# Altium PCB STM32F302VC_EVM.PcbDoc (part 12 of 19)
Units mil, origin at the board's own origin, x right, y up, seen from the top; angles counter-clockwise.
Board outline 3937.01 x 3937.01 mil, 2 copper layers (Top Layer, Bottom Layer); 117 components, 166 nets, 602 pads, 373 vias.
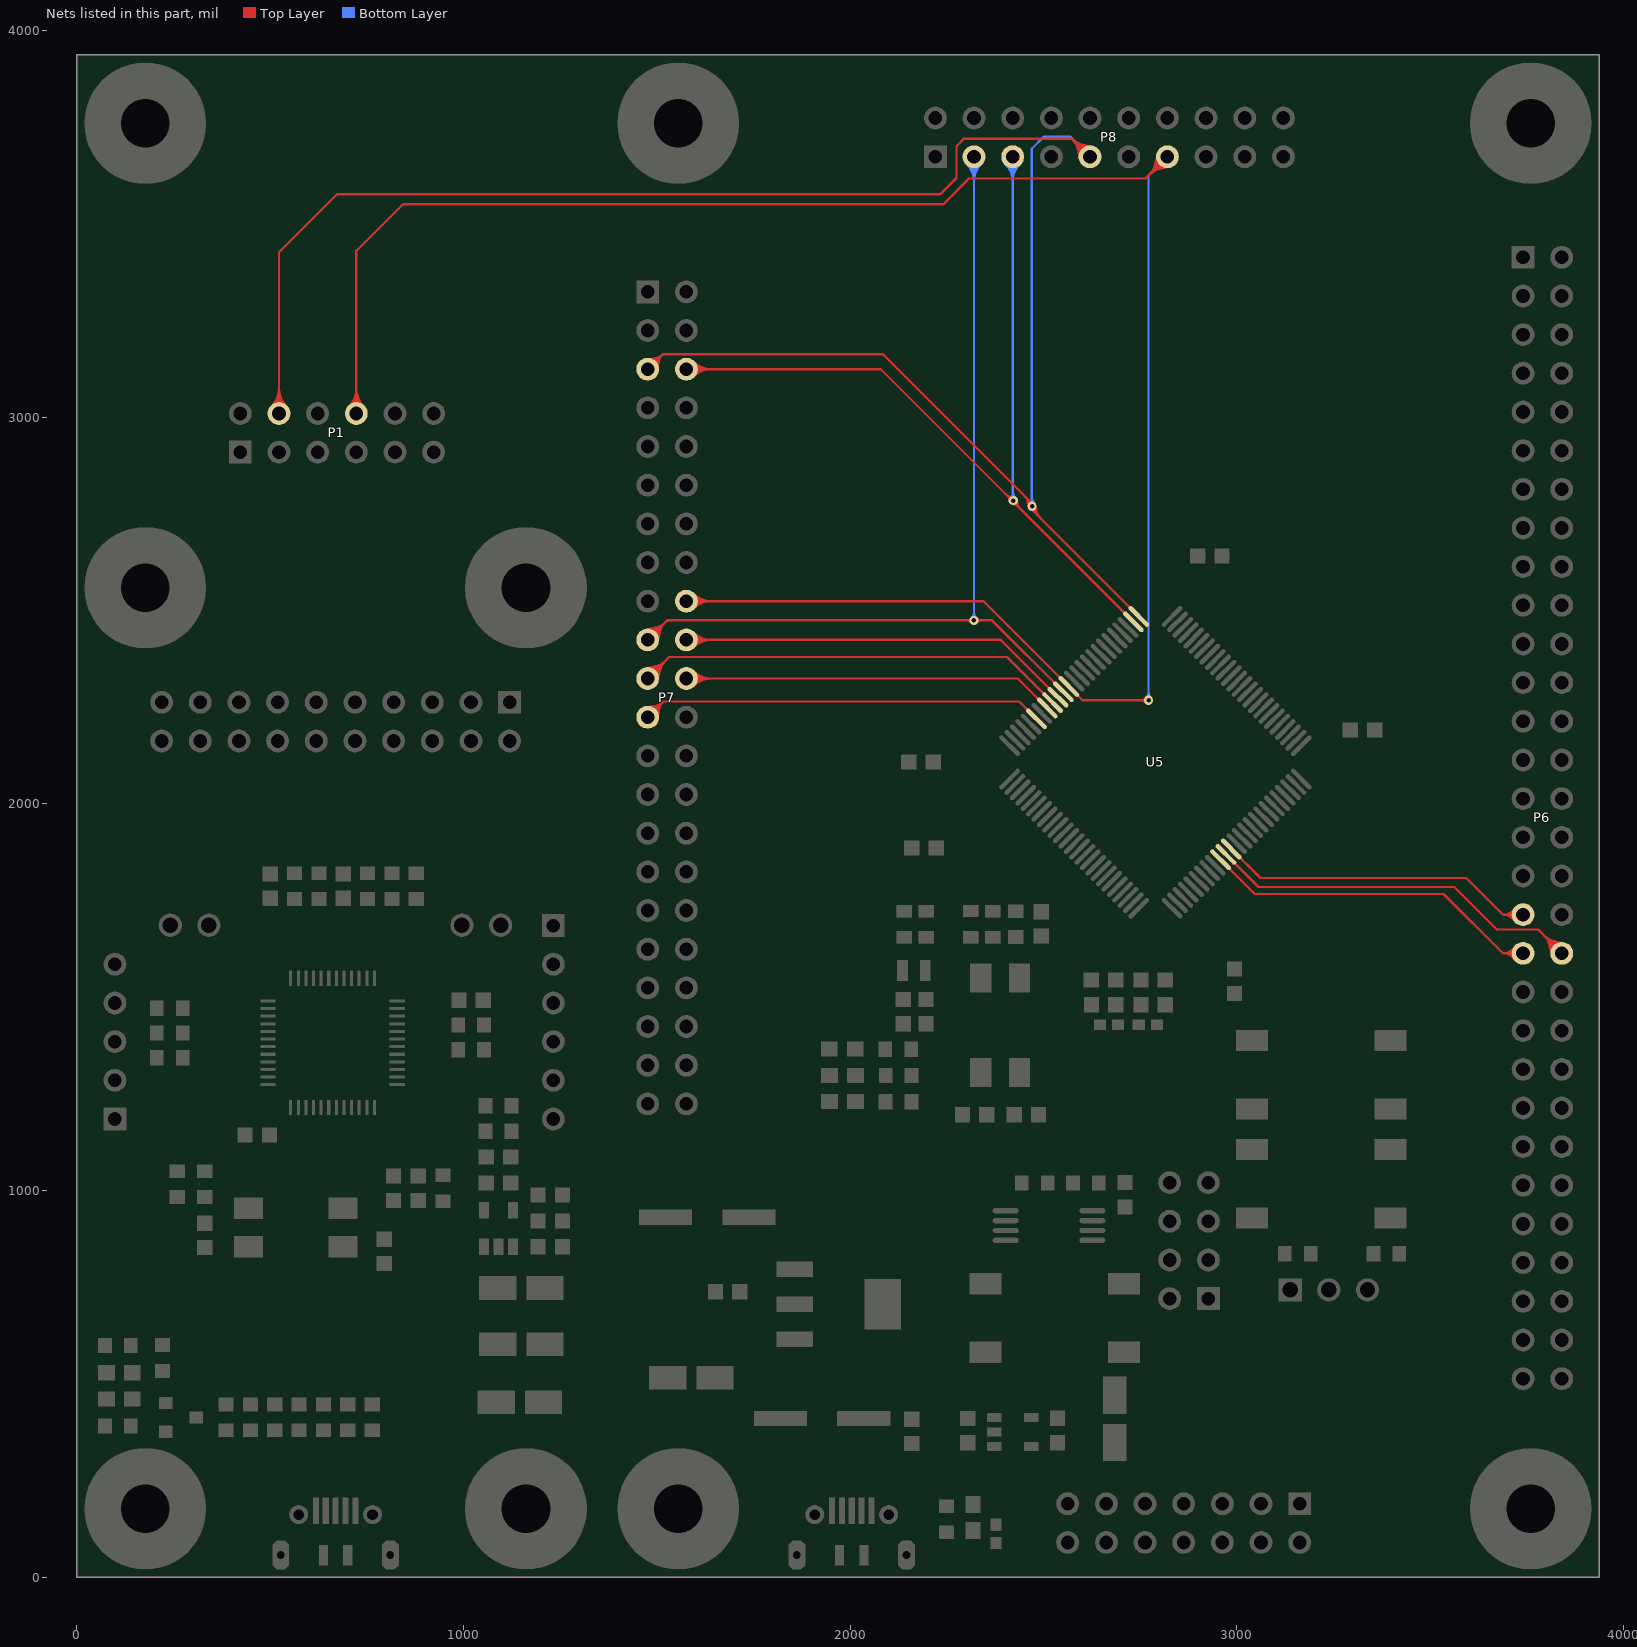
[diagram p12: the nets of this part, all layers, seen from the top]

## Via types
v1: diameter 23.62, hole 11.81, Top Layer to Bottom Layer, tented both sides, 372 vias
v2: diameter 50, hole 28, Top Layer to Bottom Layer, tented both sides, 1 vias

## Nets (pads, with @x,y where several pads share a name; then routed paths per layer and width w, separated by ;. In a path a pad name is that pad's centre, name@x,y a point inside that pad or via, vN(x,y) a via of type N, cw(c..) or ccw(c..) an arc to the next point about the centre after c; other vN are vias at no path point) (continued)
PA14: P1.4 P7.5 P8.9 U5.76 | length 12288.5
  Top Layer w6: P1.4@522.83,3009.45 522.83,3426.19 673.42,3576.77 2233.51,3576.77 2274.8,3618.06 2274.8,3700.74 2294.34,3720.28 2573.42,3720.28 P8.9@2620.28,3673.43 ; P7.5@1472.91,3124.14 cw(c1500.19,3123.15) 1492.04,3149.21 ; P7.5@1476.07,3132.54 ccw(c1474.86,3165.82) 1506.64,3155.87 ; P7.5@1476.12,3132.54 ccw(c1475.11,3165.49) 1506.55,3155.57 ; P7.5@1476.38,3124.02 1514.91,3162.54 ; P7.5@1476.5,3120.55 ccw(c1475.51,3147.83) 1501.57,3139.67 ; P7.5@1478.9,3123.92 cw(c1509.18,3122.82) 1500.13,3151.74 ; P7.5@1478.9,3123.94 cw(c1508.9,3123.02) 1499.87,3151.64 ; P7.5@1480.86,3144.05 ccw(c1485.29,3163.81) 1496.92,3147.24 ; P7.5@1482.08,3143.74 ccw(c1487.83,3163.62) 1505.96,3153.64 ; P7.5@1482.17,3149.9 ccw(c1489.3,3181.73) 1508.03,3155.04 ccw(c1518.77,3139.74) P7.5@1501.25,3133.24 ; P7.5@1482.18,3143.71 ccw(c1487.96,3163.3) 1505.86,3153.45 ; P7.5@1483.52,3143.26 ccw(c1489.31,3158.87) 1502.93,3149.3 ; P7.5@1484.9,3123.71 cw(c1518.18,3122.5) 1508.23,3154.28 ; P7.5@1484.9,3123.76 cw(c1517.85,3122.75) 1507.93,3154.18 ; P7.5@1484.99,3149.11 ccw(c1491.73,3168.78) 1506.21,3153.84 ; P7.5@1485.13,3149.06 ccw(c1491.85,3168.28) 1506.19,3153.83 ; P7.5@1485.55,3148.91 ccw(c1492.17,3166.87) 1505.92,3153.55 ; P7.5@1485.6,3148.89 ccw(c1492.1,3166.41) 1507.4,3155.67 ccw(c1534.09,3136.93) P7.5@1502.27,3129.81 ; P7.5@1495.62,3131.15 cw(c1511.23,3136.94) 1501.67,3150.57 ; P7.5@1496.07,3129.83 cw(c1515.65,3135.6) 1505.79,3153.48 ; P7.5@1496.41,3128.5 cw(c1516.17,3132.92) 1499.6,3144.56 ; P7.5@1501.27,3133.19 cw(c1519.24,3139.81) 1505.91,3153.56 ; P7.5@1501.31,3133.07 cw(c1519.63,3139.71) 1505.9,3153.54 ; P7.5@1501.34,3132.98 cw(c1519.91,3139.65) 1505.91,3153.54 ; P7.5@1501.42,3132.77 cw(c1520.65,3139.48) 1506.19,3153.83 ; P7.5@1501.47,3132.62 cw(c1521.15,3139.37) 1506.21,3153.84 ; 1504,3147.51 cw(c1475.38,3156.54) 1476.3,3126.54 ccw(c1475.19,3156.82) 1504.1,3147.77 ; 1505.98,3153.59 ccw(c1515.96,3135.47) P7.5@1496.1,3129.72 ; 2460.1,2781.75 cw(c2455.21,2775.76) v1@2462.4,2772.92 ; 2460.91,2781.09 ccw(c2468.49,2790.39) v1@2469.7,2778.45 ; v1@2470.88,2760.88 cw(c2471.27,2748.88) 2479.47,2757.64 ; v1@2478.95,2766.9 ccw(c2489.37,2763.42) 2481.86,2755.41 ; U5.76@2746.22,2484.5 2470.59,2760.13 2470.59,2776.45 2084.5,3162.54 1514.91,3162.54 ; P1.4@504.08,3028.21 ccw(c458.79,3073.49) 522.83,3073.49 ; P1.4@504.08,3028.21 ccw(c458.79,3073.49) 522.83,3073.49 ; P1.4@504.08,3028.21 ccw(c458.79,3073.49) 522.83,3073.49 ; P1.4@508.32,3023.96 ccw(c473.28,3059.01) 522.83,3059.01 ; P1.4@508.32,3023.96 ccw(c473.28,3059.01) 522.83,3059.01 ; P1.4@508.32,3023.96 ccw(c473.28,3059.01) 522.83,3059.01 ; P1.4@512.56,3019.72 ccw(c487.76,3044.52) 522.83,3044.52 ; P1.4@512.56,3019.72 ccw(c487.76,3044.52) 522.83,3044.52 ; P1.4@512.56,3019.72 ccw(c487.76,3044.52) 522.83,3044.52 ; 522.83,3044.52 ccw(c557.91,3044.52) P1.4@533.11,3019.72 ; 522.83,3044.52 ccw(c557.91,3044.52) P1.4@533.11,3019.72 ; 522.83,3044.52 ccw(c557.91,3044.52) P1.4@533.11,3019.72 ; 522.83,3059.01 ccw(c572.39,3059.01) P1.4@537.35,3023.96 ; 522.83,3059.01 ccw(c572.39,3059.01) P1.4@537.35,3023.96 ; 522.83,3059.01 ccw(c572.39,3059.01) P1.4@537.35,3023.96 ; 522.83,3073.49 ccw(c586.88,3073.49) P1.4@541.59,3028.21 ; 522.83,3073.49 ccw(c586.88,3073.49) P1.4@541.59,3028.21 ; 522.83,3073.49 ccw(c586.88,3073.49) P1.4@541.59,3028.21 ; P7.5@1463.55,3132.67 cw(c1501.91,3106.78) 1495.4,3152.6 ; P7.5@1463.55,3132.67 cw(c1501.91,3106.78) 1495.4,3152.6 ; P7.5@1463.55,3132.67 cw(c1501.91,3106.78) 1495.4,3152.6 ; P7.5@1478.13,3138.44 ccw(c1480.95,3161.64) 1497.48,3145.11 ; P7.5@1478.13,3138.44 ccw(c1480.95,3161.64) 1497.48,3145.11 ; P7.5@1478.13,3138.44 ccw(c1480.95,3161.64) 1497.48,3145.11 ; P7.5@1478.85,3144.39 ccw(c1482.83,3177.19) 1506.19,3153.83 ; P7.5@1478.85,3144.39 ccw(c1482.83,3177.19) 1506.19,3153.83 ; P7.5@1478.85,3144.39 ccw(c1482.83,3177.19) 1506.19,3153.83 ; P7.5@1479.58,3150.35 ccw(c1484.72,3192.73) 1514.9,3162.54 ; P7.5@1479.58,3150.35 ccw(c1484.72,3192.73) 1514.9,3162.54 ; P7.5@1479.58,3150.35 ccw(c1484.72,3192.73) 1514.9,3162.54 ; P7.5@1480.41,3137.97 ccw(c1485.7,3156.31) 1502.47,3147.21 ; P7.5@1480.41,3137.97 ccw(c1485.7,3156.31) 1502.47,3147.21 ; P7.5@1480.41,3137.97 ccw(c1485.7,3156.31) 1502.47,3147.21 ; P7.5@1482.07,3143.74 ccw(c1487.82,3163.65) 1506.03,3153.76 ; P7.5@1482.07,3143.74 ccw(c1487.82,3163.65) 1506.03,3153.76 ; P7.5@1482.07,3143.74 ccw(c1487.82,3163.65) 1506.03,3153.76 ; P7.5@1483.92,3149.45 ccw(c1490.6,3172) 1501.82,3151.33 ; P7.5@1483.92,3149.45 ccw(c1490.6,3172) 1501.82,3151.33 ; P7.5@1483.92,3149.45 ccw(c1490.6,3172) 1501.82,3151.33 ; P7.5@1485.04,3111.19 ccw(c1459.14,3149.54) 1504.96,3143.04 ; P7.5@1485.04,3111.19 ccw(c1459.14,3149.54) 1504.96,3143.04 ; P7.5@1485.04,3111.19 ccw(c1459.14,3149.54) 1504.96,3143.04 ; P7.5@1485.1,3149.07 ccw(c1491.83,3168.37) 1506.19,3153.83 ; P7.5@1485.1,3149.07 ccw(c1491.83,3168.37) 1506.19,3153.83 ; P7.5@1485.1,3149.07 ccw(c1491.83,3168.37) 1506.19,3153.83 ; P7.5@1485.24,3149.02 ccw(c1491.93,3167.91) 1506.19,3153.83 ; P7.5@1485.24,3149.02 ccw(c1491.93,3167.91) 1506.19,3153.83 ; P7.5@1485.24,3149.02 ccw(c1491.93,3167.91) 1506.19,3153.83 ; P7.5@1485.32,3148.99 ccw(c1491.99,3167.63) 1505.9,3153.55 ; P7.5@1485.32,3148.99 ccw(c1491.99,3167.63) 1505.9,3153.55 ; P7.5@1485.32,3148.99 ccw(c1491.99,3167.63) 1505.9,3153.55 ; P7.5@1485.45,3148.94 ccw(c1492.1,3167.19) 1505.91,3153.54 ; P7.5@1485.45,3148.94 ccw(c1492.1,3167.19) 1505.91,3153.54 ; P7.5@1485.43,3148.95 ccw(c1492.08,3167.27) 1505.91,3153.54 ; P7.5@1485.45,3148.94 ccw(c1492.1,3167.19) 1505.91,3153.54 ; P7.5@1490.34,3128.04 cw(c1508.67,3133.34) 1499.57,3150.11 ; P7.5@1490.34,3128.04 cw(c1508.67,3133.34) 1499.57,3150.11 ; P7.5@1490.34,3128.04 cw(c1508.67,3133.34) 1499.57,3150.11 ; P7.5@1490.8,3125.77 cw(c1514.01,3128.58) 1497.48,3145.11 ; P7.5@1490.8,3125.77 cw(c1514.01,3128.58) 1497.48,3145.11 ; P7.5@1490.8,3125.77 cw(c1514.01,3128.58) 1497.48,3145.11 ; P7.5@1496.1,3129.71 cw(c1516.01,3135.45) 1506.13,3153.67 ; P7.5@1496.1,3129.71 cw(c1516.01,3135.45) 1506.13,3153.67 ; P7.5@1496.1,3129.71 cw(c1516.01,3135.45) 1506.13,3153.67 ; P7.5@1496.76,3126.49 cw(c1529.55,3130.47) 1506.19,3153.83 ; P7.5@1496.76,3126.49 cw(c1529.55,3130.47) 1506.19,3153.83 ; P7.5@1496.76,3126.49 cw(c1529.55,3130.47) 1506.19,3153.83 ; P7.5@1501.3,3133.09 cw(c1519.55,3139.73) 1505.9,3153.55 ; P7.5@1501.3,3133.09 cw(c1519.55,3139.73) 1505.9,3153.55 ; P7.5@1501.3,3133.09 cw(c1519.55,3139.73) 1505.9,3153.55 ; P7.5@1501.35,3132.97 cw(c1519.96,3139.64) 1506.21,3153.84 ; P7.5@1501.35,3132.96 cw(c1520,3139.63) 1505.91,3153.54 ; P7.5@1501.35,3132.96 cw(c1520,3139.63) 1505.91,3153.54 ; P7.5@1501.35,3132.96 cw(c1520,3139.63) 1505.91,3153.54 ; P7.5@1501.38,3132.87 cw(c1520.28,3139.57) 1506.19,3153.83 ; P7.5@1501.39,3132.85 cw(c1520.36,3139.55) 1506.19,3153.83 ; P7.5@1501.38,3132.87 cw(c1520.28,3139.57) 1506.19,3153.83 ; P7.5@1501.4,3132.84 cw(c1520.4,3139.54) 1505.92,3153.55 ; P7.5@1501.38,3132.87 cw(c1520.28,3139.57) 1506.19,3153.83 ; P7.5@1501.43,3132.74 cw(c1520.73,3139.46) 1506.19,3153.83 ; P7.5@1501.43,3132.74 cw(c1520.73,3139.46) 1506.19,3153.83 ; P7.5@1501.43,3132.74 cw(c1520.73,3139.46) 1506.19,3153.83 ; P7.5@1501.81,3131.55 cw(c1524.36,3138.24) 1503.69,3149.46 ; P7.5@1501.81,3131.55 cw(c1524.36,3138.24) 1503.69,3149.46 ; P7.5@1501.81,3131.55 cw(c1524.36,3138.24) 1503.69,3149.46 ; P7.5@1502.71,3127.21 cw(c1545.09,3132.36) 1514.9,3162.54 ; P7.5@1502.71,3127.21 cw(c1545.09,3132.36) 1514.9,3162.54 ; P7.5@1502.71,3127.21 cw(c1545.09,3132.36) 1514.9,3162.54 ; 1505.9,3153.54 cw(c1492.01,3167.54) 1485.34,3148.98 ccw(c1492,3167.59) 1506.21,3153.84 ; 1505.92,3153.56 cw(c1491.9,3168.03) 1485.2,3149.03 ccw(c1491.91,3168) 1506.19,3153.83 ; 2450.77,2796.28 cw(c2424.17,2769.68) v1@2461.78,2769.68 ; 2450.77,2796.28 cw(c2424.17,2769.68) v1@2461.78,2769.68 ; 2450.77,2796.28 cw(c2424.17,2769.68) v1@2461.78,2769.68 ; 2456.2,2790.52 ccw(c2483.22,2797.76) v1@2471.75,2772.25 ; 2456.2,2790.52 ccw(c2483.22,2797.76) v1@2471.75,2772.25 ; 2456.2,2790.52 ccw(c2483.22,2797.76) v1@2471.75,2772.25 ; 2459.47,2778.31 ccw(c2476.53,2782.88) v1@2469.29,2766.78 ; 2459.47,2778.31 ccw(c2476.53,2782.88) v1@2469.29,2766.78 ; 2459.47,2778.31 ccw(c2476.53,2782.88) v1@2469.29,2766.78 ; 2461.01,2786.04 cw(c2444.65,2769.68) v1@2467.78,2769.68 ; 2461.01,2786.04 cw(c2444.65,2769.68) v1@2467.78,2769.68 ; 2461.01,2786.04 cw(c2444.65,2769.68) v1@2467.78,2769.68 ; v1@2462.96,2774.09 ccw(c2452.57,2780.09) 2464.16,2783.2 ; v1@2462.96,2774.09 ccw(c2452.57,2780.09) 2464.16,2783.2 ; v1@2462.96,2774.09 ccw(c2452.57,2780.09) 2464.16,2783.2 ; v1@2469.27,2767.21 cw(c2453.7,2738.11) 2485.58,2746.65 ; v1@2469.27,2767.21 cw(c2453.7,2738.11) 2485.58,2746.65 ; v1@2469.27,2767.21 cw(c2453.7,2738.11) 2485.58,2746.65 ; v1@2472.1,2772.5 cw(c2462.65,2754.84) 2481.99,2760.02 ; v1@2472.1,2772.5 cw(c2462.65,2754.84) 2481.99,2760.02 ; v1@2472.1,2772.5 cw(c2462.65,2754.84) 2481.99,2760.02 ; v1@2473.4,2769.68 ccw(c2503.27,2769.68) 2482.15,2748.57 ; v1@2473.4,2769.68 ccw(c2503.27,2769.68) 2482.15,2748.57 ; v1@2473.4,2769.68 ccw(c2503.27,2769.68) 2482.15,2748.57 ; 2477.02,2756.17 cw(c2488.62,2759.28) v1@2478.22,2765.28 ; 2477.02,2756.17 cw(c2488.62,2759.28) v1@2478.22,2765.28 ; 2477.02,2756.17 cw(c2488.62,2759.28) v1@2478.22,2765.28 ; v1@2479.4,2769.68 ccw(c2523.75,2769.68) 2492.39,2738.33 ; v1@2479.4,2769.68 ccw(c2523.75,2769.68) 2492.39,2738.33 ; v1@2479.4,2769.68 ccw(c2523.75,2769.68) 2492.39,2738.33 ; 2574.99,3718.71 cw(c2529.7,3673.43) P8.9@2593.75,3673.43 ; 2574.99,3718.71 ccw(c2620.28,3764) P8.9@2620.28,3699.95 ; 2574.99,3718.71 ccw(c2620.28,3764) P8.9@2620.28,3699.95 ; 2574.99,3718.71 cw(c2529.7,3673.43) P8.9@2593.75,3673.43 ; 2574.99,3718.71 ccw(c2620.28,3764) P8.9@2620.28,3699.95 ; 2574.99,3718.71 cw(c2529.7,3673.43) P8.9@2593.75,3673.43 ; 2585.23,3708.47 cw(c2550.19,3673.43) P8.9@2599.75,3673.43 ; 2585.23,3708.47 ccw(c2620.28,3743.51) P8.9@2620.28,3693.95 ; 2585.23,3708.47 ccw(c2620.28,3743.51) P8.9@2620.28,3693.95 ; 2585.23,3708.47 cw(c2550.19,3673.43) P8.9@2599.75,3673.43 ; 2585.23,3708.47 ccw(c2620.28,3743.51) P8.9@2620.28,3693.95 ; 2585.23,3708.47 cw(c2550.19,3673.43) P8.9@2599.75,3673.43 ; 2586.25,3701.42 ccw(c2628.32,3712.69) P8.9@2619.58,3670.02 ; 2586.25,3701.42 ccw(c2628.32,3712.69) P8.9@2619.58,3670.02 ; 2586.25,3701.42 ccw(c2628.32,3712.69) P8.9@2619.58,3670.02 ; 2588.76,3692.04 ccw(c2626.14,3702.06) P8.9@2618.38,3664.15 ; 2588.76,3692.04 ccw(c2626.14,3702.06) P8.9@2618.38,3664.15 ; 2588.76,3692.04 ccw(c2626.14,3702.06) P8.9@2618.38,3664.15 ; 2591.27,3682.66 ccw(c2623.96,3691.42) P8.9@2617.17,3658.27 ; 2591.27,3682.66 ccw(c2623.96,3691.42) P8.9@2617.17,3658.27 ; 2591.27,3682.66 ccw(c2623.96,3691.42) P8.9@2617.17,3658.27 ; 2592.28,3707.45 cw(c2581.01,3665.38) P8.9@2623.68,3674.12 ; 2592.28,3707.45 cw(c2581.01,3665.38) P8.9@2623.68,3674.12 ; 2592.28,3707.45 cw(c2581.01,3665.38) P8.9@2623.68,3674.12 ; 2592.97,3698.72 ccw(c2622.76,3706.7) P8.9@2620.46,3675.95 ; 2592.97,3698.72 ccw(c2622.76,3706.7) P8.9@2620.46,3675.95 ; 2592.97,3698.72 ccw(c2622.76,3706.7) P8.9@2620.46,3675.95 ; 2594.99,3700.73 cw(c2587,3670.94) P8.9@2617.76,3673.24 ; 2594.99,3700.73 cw(c2587,3670.94) P8.9@2617.76,3673.24 ; 2594.99,3700.73 cw(c2587,3670.94) P8.9@2617.76,3673.24 ; 2595.16,3690.55 ccw(c2622.09,3697.77) P8.9@2620.02,3669.96 ; 2595.16,3690.55 ccw(c2622.09,3697.77) P8.9@2620.02,3669.96 ; 2595.16,3690.55 ccw(c2622.09,3697.77) P8.9@2620.02,3669.96 ; 2595.48,3698.23 cw(c2570.68,3673.43) P8.9@2605.75,3673.43 ; 2595.48,3698.23 ccw(c2620.28,3723.03) P8.9@2620.28,3687.95 ; 2595.48,3698.23 ccw(c2620.28,3723.03) P8.9@2620.28,3687.95 ; 2595.48,3698.23 cw(c2570.68,3673.43) P8.9@2605.75,3673.43 ; 2595.48,3698.23 ccw(c2620.28,3723.03) P8.9@2620.28,3687.95 ; 2595.48,3698.23 cw(c2570.68,3673.43) P8.9@2605.75,3673.43 ; 2601.66,3704.94 cw(c2591.65,3667.56) P8.9@2629.56,3675.33 ; 2601.66,3704.94 cw(c2591.65,3667.56) P8.9@2629.56,3675.33 ; 2601.66,3704.94 cw(c2591.65,3667.56) P8.9@2629.56,3675.33 ; 2603.15,3698.54 cw(c2595.93,3671.61) P8.9@2623.74,3673.68 ; 2603.15,3698.54 cw(c2595.93,3671.61) P8.9@2623.74,3673.68 ; 2603.15,3698.54 cw(c2595.93,3671.61) P8.9@2623.74,3673.68 ; 2611.04,3702.43 cw(c2602.28,3669.74) P8.9@2635.43,3676.53 ; 2611.04,3702.43 cw(c2602.28,3669.74) P8.9@2635.43,3676.53 ; 2611.04,3702.43 cw(c2602.28,3669.74) P8.9@2635.43,3676.53 ; 2720.38,2510.34 cw(c2715.42,2505.38) U5.76@2722.44,2505.38 ; 2720.38,2510.34 ccw(c2725.34,2515.3) U5.76@2725.34,2508.28 ; 2720.38,2510.34 ccw(c2725.34,2515.3) U5.76@2725.34,2508.28 ; 2720.38,2510.34 cw(c2715.42,2505.38) U5.76@2722.44,2505.38 ; 2720.38,2510.34 ccw(c2725.34,2515.3) U5.76@2725.34,2508.28 ; 2720.38,2510.34 cw(c2715.42,2505.38) U5.76@2722.44,2505.38
  Bottom Layer w6: v1(2470.59,2769.68) 2470.59,2762.93 2470.05,2762.39 2469.49,2762.39 2469.49,3693.9 2500.98,3725.39 2568.31,3725.39 P8.9@2620.28,3673.43 ; v1@2464.36,2775.92 ccw(c2451.99,2788.29) 2469.49,2788.29 ; v1@2464.36,2775.92 ccw(c2451.99,2788.29) 2469.49,2788.29 ; v1@2464.36,2775.92 ccw(c2451.99,2788.29) 2469.49,2788.29 ; 2469.49,2793.62 ccw(c2494.53,2793.62) v1@2476.82,2775.92 ; 2469.49,2793.62 ccw(c2494.53,2793.62) v1@2476.82,2775.92 ; 2469.49,2793.62 ccw(c2494.53,2793.62) v1@2476.82,2775.92 ; 2574.99,3718.71 cw(c2529.7,3673.43) P8.9@2593.75,3673.43 ; 2574.99,3718.71 ccw(c2620.28,3764) P8.9@2620.28,3699.95 ; 2574.99,3718.71 ccw(c2620.28,3764) P8.9@2620.28,3699.95 ; 2574.99,3718.71 cw(c2529.7,3673.43) P8.9@2593.75,3673.43 ; 2574.99,3718.71 ccw(c2620.28,3764) P8.9@2620.28,3699.95 ; 2574.99,3718.71 cw(c2529.7,3673.43) P8.9@2593.75,3673.43 ; 2585.23,3708.47 cw(c2550.19,3673.43) P8.9@2599.75,3673.43 ; 2585.23,3708.47 ccw(c2620.28,3743.51) P8.9@2620.28,3693.95 ; 2585.23,3708.47 ccw(c2620.28,3743.51) P8.9@2620.28,3693.95 ; 2585.23,3708.47 cw(c2550.19,3673.43) P8.9@2599.75,3673.43 ; 2585.23,3708.47 ccw(c2620.28,3743.51) P8.9@2620.28,3693.95 ; 2585.23,3708.47 cw(c2550.19,3673.43) P8.9@2599.75,3673.43 ; 2595.48,3698.23 cw(c2570.68,3673.43) P8.9@2605.75,3673.43 ; 2595.48,3698.23 ccw(c2620.28,3723.03) P8.9@2620.28,3687.95 ; 2595.48,3698.23 ccw(c2620.28,3723.03) P8.9@2620.28,3687.95 ; 2595.48,3698.23 cw(c2570.68,3673.43) P8.9@2605.75,3673.43 ; 2595.48,3698.23 ccw(c2620.28,3723.03) P8.9@2620.28,3687.95 ; 2595.48,3698.23 cw(c2570.68,3673.43) P8.9@2605.75,3673.43
PA15: P7.6 P8.5 U5.77 | length 4207.9
  Top Layer w6: P7.6@1576.38,3124.02 2078.86,3124.02 U5.77@2732.3,2470.58 ; P7.6@1586.65,3113.74 cw(c1611.45,3088.94) 1611.45,3124.02 ; P7.6@1586.65,3113.74 cw(c1611.45,3088.94) 1611.45,3124.02 ; P7.6@1586.65,3113.74 cw(c1611.45,3088.94) 1611.45,3124.02 ; P7.6@1586.65,3134.29 ccw(c1611.45,3159.09) 1611.45,3124.02 ; P7.6@1586.65,3134.29 ccw(c1611.45,3159.09) 1611.45,3124.02 ; P7.6@1586.65,3134.29 ccw(c1611.45,3159.09) 1611.45,3124.02 ; P7.6@1590.89,3109.5 cw(c1625.93,3074.46) 1625.93,3124.02 ; P7.6@1590.89,3109.5 cw(c1625.93,3074.46) 1625.93,3124.02 ; P7.6@1590.89,3109.5 cw(c1625.93,3074.46) 1625.93,3124.02 ; P7.6@1590.89,3138.53 ccw(c1625.94,3173.57) 1625.94,3124.02 ; P7.6@1590.89,3138.53 ccw(c1625.94,3173.57) 1625.94,3124.02 ; P7.6@1590.89,3138.53 ccw(c1625.94,3173.57) 1625.94,3124.02 ; P7.6@1595.14,3105.26 cw(c1640.42,3059.97) 1640.42,3124.02 ; P7.6@1595.14,3105.26 cw(c1640.42,3059.97) 1640.42,3124.02 ; P7.6@1595.14,3105.26 cw(c1640.42,3059.97) 1640.42,3124.02 ; P7.6@1595.14,3142.77 ccw(c1640.42,3188.06) 1640.42,3124.02 ; P7.6@1595.14,3142.77 ccw(c1640.42,3188.06) 1640.42,3124.02 ; P7.6@1595.14,3142.77 ccw(c1640.42,3188.06) 1640.42,3124.02 ; 2401.74,2801.15 ccw(c2421.72,2821.14) v1@2421.72,2792.87 ; 2401.74,2801.15 ccw(c2421.72,2821.14) v1@2421.72,2792.87 ; 2401.74,2801.15 ccw(c2421.72,2821.14) v1@2421.72,2792.87 ; 2408.73,2794.15 cw(c2398.64,2784.05) v1@2412.91,2784.05 ; 2408.73,2794.15 cw(c2398.64,2784.05) v1@2412.91,2784.05 ; 2408.73,2794.15 cw(c2398.64,2784.05) v1@2412.91,2784.05 ; 2411.98,2790.9 ccw(c2421.72,2800.65) v1@2421.72,2786.87 ; 2411.98,2790.9 ccw(c2421.72,2800.65) v1@2421.72,2786.87 ; 2411.98,2790.9 ccw(c2421.72,2800.65) v1@2421.72,2786.87 ; 2414.53,2794.79 cw(c2410.72,2780.56) v1@2424.76,2785.02 ; 2414.53,2794.79 cw(c2410.72,2780.56) v1@2424.76,2785.02 ; 2414.53,2794.79 cw(c2410.72,2780.56) v1@2424.76,2785.02 ; v1@2421.72,2775.24 cw(c2421.72,2760.97) 2431.82,2771.06 ; v1@2421.72,2775.24 cw(c2421.72,2760.97) 2431.82,2771.06 ; v1@2421.72,2775.24 cw(c2421.72,2760.97) 2431.82,2771.06 ; v1@2422.69,2787.09 cw(c2418.23,2773.05) 2432.46,2776.86 ; v1@2422.69,2787.09 cw(c2418.23,2773.05) 2432.46,2776.86 ; v1@2422.69,2787.09 cw(c2418.23,2773.05) 2432.46,2776.86 ; v1@2424.54,2784.05 ccw(c2438.32,2784.05) 2428.57,2774.31 ; v1@2424.54,2784.05 ccw(c2438.32,2784.05) 2428.57,2774.31 ; v1@2424.54,2784.05 ccw(c2438.32,2784.05) 2428.57,2774.31 ; v1@2430.54,2784.05 ccw(c2458.81,2784.05) 2438.82,2764.06 ; v1@2430.54,2784.05 ccw(c2458.81,2784.05) 2438.82,2764.06 ; v1@2430.54,2784.05 ccw(c2458.81,2784.05) 2438.82,2764.06 ; 2706.46,2496.42 cw(c2701.5,2491.46) U5.77@2708.52,2491.46 ; 2706.46,2496.42 ccw(c2711.42,2501.38) U5.77@2711.42,2494.36 ; 2706.46,2496.42 ccw(c2711.42,2501.38) U5.77@2711.42,2494.36 ; 2706.46,2496.42 cw(c2701.5,2491.46) U5.77@2708.52,2491.46 ; 2706.46,2496.42 ccw(c2711.42,2501.38) U5.77@2711.42,2494.36 ; 2706.46,2496.42 cw(c2701.5,2491.46) U5.77@2708.52,2491.46
  Bottom Layer w6: P8.5@2420.28,3673.43 2420.28,2782.61 v1(2421.72,2784.05) ; P8.5@2401.52,3654.67 cw(c2356.23,3609.38) 2420.28,3609.38 ; P8.5@2401.52,3654.67 cw(c2356.23,3609.38) 2420.28,3609.38 ; P8.5@2401.52,3654.67 cw(c2356.23,3609.38) 2420.28,3609.38 ; P8.5@2405.76,3658.91 cw(c2370.72,3623.87) 2420.28,3623.87 ; P8.5@2405.76,3658.91 cw(c2370.72,3623.87) 2420.28,3623.87 ; P8.5@2405.76,3658.91 cw(c2370.72,3623.87) 2420.28,3623.87 ; P8.5@2410,3663.15 cw(c2385.2,3638.35) 2420.28,3638.35 ; P8.5@2410,3663.15 cw(c2385.2,3638.35) 2420.28,3638.35 ; P8.5@2410,3663.15 cw(c2385.2,3638.35) 2420.28,3638.35 ; v1@2415.49,2790.28 ccw(c2403.95,2801.83) 2420.28,2801.83 ; v1@2415.49,2790.28 ccw(c2403.95,2801.83) 2420.28,2801.83 ; v1@2415.49,2790.28 ccw(c2403.95,2801.83) 2420.28,2801.83 ; 2420.28,2808.83 ccw(c2446.5,2808.83) v1@2427.96,2790.28 ; 2420.28,2808.83 ccw(c2446.5,2808.83) v1@2427.96,2790.28 ; 2420.28,2808.83 ccw(c2446.5,2808.83) v1@2427.96,2790.28 ; 2420.28,3609.38 cw(c2484.32,3609.38) P8.5@2439.03,3654.67 ; 2420.28,3609.38 cw(c2484.32,3609.38) P8.5@2439.03,3654.67 ; 2420.28,3609.38 cw(c2484.32,3609.38) P8.5@2439.03,3654.67 ; 2420.28,3623.87 cw(c2469.83,3623.87) P8.5@2434.79,3658.91 ; 2420.28,3623.87 cw(c2469.83,3623.87) P8.5@2434.79,3658.91 ; 2420.28,3623.87 cw(c2469.83,3623.87) P8.5@2434.79,3658.91 ; 2420.28,3638.35 cw(c2455.35,3638.35) P8.5@2430.55,3663.15 ; 2420.28,3638.35 cw(c2455.35,3638.35) P8.5@2430.55,3663.15 ; 2420.28,3638.35 cw(c2455.35,3638.35) P8.5@2430.55,3663.15
PB0: P6.37 U5.35 | length 1296.4
  Top Layer w6: U5.35@2957.8,1855.34 3046.4,1766.73 3534.65,1766.73 3687.99,1613.39 ; P6.37@3740.16,1613.39 3687.99,1613.39 ; U5.35@2978.67,1831.56 cw(c2978.67,1824.54) 2983.63,1829.5 ; U5.35@2978.67,1831.56 cw(c2978.67,1824.54) 2983.63,1829.5 ; U5.35@2978.67,1831.56 cw(c2978.67,1824.54) 2983.63,1829.5 ; U5.35@2981.58,1834.46 ccw(c2988.59,1834.46) 2983.63,1829.5 ; U5.35@2981.58,1834.46 ccw(c2988.59,1834.46) 2983.63,1829.5 ; U5.35@2981.58,1834.46 ccw(c2988.59,1834.46) 2983.63,1829.5 ; 3687.99,1613.39 cw(c3687.99,1575.36) P6.37@3718.72,1597.76 ; 3687.99,1613.39 ccw(c3687.99,1651.41) P6.37@3718.72,1629.01 ; 3687.99,1613.39 ccw(c3687.99,1651.41) P6.37@3718.72,1629.01 ; 3687.99,1613.39 cw(c3687.99,1575.36) P6.37@3718.72,1597.76 ; 3687.99,1613.39 ccw(c3687.99,1651.41) P6.37@3718.72,1629.01 ; 3687.99,1613.39 cw(c3687.99,1575.36) P6.37@3718.72,1597.76 ; 3699.79,1613.39 cw(c3699.79,1583.96) P6.37@3723.57,1601.29 ; 3699.79,1613.39 ccw(c3699.79,1642.81) P6.37@3723.57,1625.48 ; 3699.79,1613.39 ccw(c3699.79,1642.81) P6.37@3723.57,1625.48 ; 3699.79,1613.39 cw(c3699.79,1583.96) P6.37@3723.57,1601.29 ; 3699.79,1613.39 ccw(c3699.79,1642.81) P6.37@3723.57,1625.48 ; 3699.79,1613.39 cw(c3699.79,1583.96) P6.37@3723.57,1601.29
PB1: P6.38 U5.36 | length 2914.3
  Top Layer w6: U5.36@2971.71,1869.26 3056.1,1784.87 3562.02,1784.87 3672.03,1674.86 3779.26,1674.86 P6.38@3840.44,1613.67 ; U5.36@2992.59,1845.48 cw(c2992.59,1838.46) 2997.55,1843.42 ; U5.36@2992.59,1845.48 cw(c2992.59,1838.46) 2997.55,1843.42 ; U5.36@2992.59,1845.48 cw(c2992.59,1838.46) 2997.55,1843.42 ; U5.36@2995.5,1848.38 ccw(c3002.51,1848.38) 2997.55,1843.42 ; U5.36@2995.5,1848.38 ccw(c3002.51,1848.38) 2997.55,1843.42 ; U5.36@2995.5,1848.38 ccw(c3002.51,1848.38) 2997.55,1843.42 ; 3794.47,1659.65 cw(c3748.2,1613.39) P6.38@3813.63,1613.39 ; 3794.47,1659.65 cw(c3748.2,1613.39) P6.38@3813.63,1613.39 ; 3794.47,1659.65 cw(c3748.2,1613.39) P6.38@3813.63,1613.39 ; 3795.85,1658.26 ccw(c3840.16,1702.57) P6.38@3840.16,1639.91 ; 3795.85,1658.26 ccw(c3840.16,1702.57) P6.38@3840.16,1639.91 ; 3795.85,1658.26 ccw(c3840.16,1702.57) P6.38@3840.16,1639.91 ; 3804.71,1649.41 cw(c3768.68,1613.39) P6.38@3819.63,1613.39 ; 3804.71,1649.41 cw(c3768.68,1613.39) P6.38@3819.63,1613.39 ; 3804.71,1649.41 cw(c3768.68,1613.39) P6.38@3819.63,1613.39 ; 3806.05,1641.67 ccw(c3848.6,1653.07) P6.38@3839.44,1609.99 ; 3806.05,1641.67 ccw(c3848.6,1653.07) P6.38@3839.44,1609.99 ; 3806.05,1641.67 ccw(c3848.6,1653.07) P6.38@3839.44,1609.99 ; 3806.1,1648.02 ccw(c3840.16,1682.08) P6.38@3840.16,1633.91 ; 3806.1,1648.02 ccw(c3840.16,1682.08) P6.38@3840.16,1633.91 ; 3806.1,1648.02 ccw(c3840.16,1682.08) P6.38@3840.16,1633.91 ; 3808.58,1632.22 ccw(c3846.31,1642.32) P6.38@3838.19,1604.12 ; 3808.58,1632.22 ccw(c3846.31,1642.32) P6.38@3838.19,1604.12 ; 3808.58,1632.22 ccw(c3846.31,1642.32) P6.38@3838.19,1604.12 ; 3811.12,1622.76 ccw(c3844.03,1631.57) P6.38@3836.94,1598.25 ; 3811.12,1622.76 ccw(c3844.03,1631.57) P6.38@3836.94,1598.25 ; 3811.12,1622.76 ccw(c3844.03,1631.57) P6.38@3836.94,1598.25 ; 3812.46,1647.34 cw(c3801.31,1605.74) P6.38@3843.56,1614.06 ; 3812.46,1647.34 cw(c3801.31,1605.74) P6.38@3843.56,1614.06 ; 3812.46,1647.34 cw(c3801.31,1605.74) P6.38@3843.56,1614.06 ; 3812.76,1639.01 ccw(c3843.02,1647.12) P6.38@3840.37,1615.9 ; 3812.76,1639.01 ccw(c3843.02,1647.12) P6.38@3840.37,1615.9 ; 3812.76,1639.01 ccw(c3843.02,1647.12) P6.38@3840.37,1615.9 ; 3814.95,1639.17 cw(c3789.17,1613.39) P6.38@3825.63,1613.39 ; 3814.95,1639.17 cw(c3789.17,1613.39) P6.38@3825.63,1613.39 ; 3814.95,1639.17 cw(c3789.17,1613.39) P6.38@3825.63,1613.39 ; 3814.98,1630.76 ccw(c3842.25,1638.06) P6.38@3839.86,1609.93 ; 3814.98,1630.76 ccw(c3842.25,1638.06) P6.38@3839.86,1609.93 ; 3814.98,1630.76 ccw(c3842.25,1638.06) P6.38@3839.86,1609.93 ; 3815.2,1640.6 cw(c3807.35,1611.28) P6.38@3837.64,1613.22 ; 3815.2,1640.6 cw(c3807.35,1611.28) P6.38@3837.64,1613.22 ; 3815.2,1640.6 cw(c3807.35,1611.28) P6.38@3837.64,1613.22 ; 3816.34,1637.78 ccw(c3840.16,1661.6) P6.38@3840.16,1627.91 ; 3816.34,1637.78 ccw(c3840.16,1661.6) P6.38@3840.16,1627.91 ; 3816.34,1637.78 ccw(c3840.16,1661.6) P6.38@3840.16,1627.91 ; 3821.76,1644.84 cw(c3811.84,1607.81) P6.38@3849.45,1615.22 ; 3821.76,1644.84 cw(c3811.84,1607.81) P6.38@3849.45,1615.22 ; 3821.76,1644.84 cw(c3811.84,1607.81) P6.38@3849.45,1615.22 ; 3823.28,1638.44 cw(c3816.15,1611.85) P6.38@3843.62,1613.61 ; 3823.28,1638.44 cw(c3816.15,1611.85) P6.38@3843.62,1613.61 ; 3823.28,1638.44 cw(c3816.15,1611.85) P6.38@3843.62,1613.61 ; 3831.06,1642.35 cw(c3822.36,1609.88) P6.38@3855.34,1616.37 ; 3831.06,1642.35 cw(c3822.36,1609.88) P6.38@3855.34,1616.37 ; 3831.06,1642.35 cw(c3822.36,1609.88) P6.38@3855.34,1616.37
PB2: P6.35 U5.37 | length 1238.7
  Top Layer w6: U5.37@2985.63,1883.18 3060.74,1808.07 3593.31,1808.07 3687.99,1713.39 ; P6.35@3740.16,1713.39 3687.99,1713.39 ; U5.37@3006.51,1859.4 cw(c3006.51,1852.38) 3011.47,1857.34 ; U5.37@3006.51,1859.4 cw(c3006.51,1852.38) 3011.47,1857.34 ; U5.37@3006.51,1859.4 cw(c3006.51,1852.38) 3011.47,1857.34 ; U5.37@3009.42,1862.3 ccw(c3016.43,1862.3) 3011.47,1857.34 ; U5.37@3009.42,1862.3 ccw(c3016.43,1862.3) 3011.47,1857.34 ; U5.37@3009.42,1862.3 ccw(c3016.43,1862.3) 3011.47,1857.34 ; 3687.99,1713.39 cw(c3687.99,1675.36) P6.35@3718.72,1697.76 ; 3687.99,1713.39 ccw(c3687.99,1751.41) P6.35@3718.72,1729.01 ; 3687.99,1713.39 ccw(c3687.99,1751.41) P6.35@3718.72,1729.01 ; 3687.99,1713.39 cw(c3687.99,1675.36) P6.35@3718.72,1697.76 ; 3687.99,1713.39 ccw(c3687.99,1751.41) P6.35@3718.72,1729.01 ; 3687.99,1713.39 cw(c3687.99,1675.36) P6.35@3718.72,1697.76 ; 3699.79,1713.39 cw(c3699.79,1683.96) P6.35@3723.57,1701.29 ; 3699.79,1713.39 ccw(c3699.79,1742.81) P6.35@3723.57,1725.48 ; 3699.79,1713.39 ccw(c3699.79,1742.81) P6.35@3723.57,1725.48 ; 3699.79,1713.39 cw(c3699.79,1683.96) P6.35@3723.57,1701.29 ; 3699.79,1713.39 ccw(c3699.79,1742.81) P6.35@3723.57,1725.48 ; 3699.79,1713.39 cw(c3699.79,1683.96) P6.35@3723.57,1701.29
PB3: P1.8 P7.18 P8.13 U5.89 | length 9621.1
  Top Layer w6: P1.8@722.83,3009.45 722.83,3429.94 843.46,3550.57 2241.25,3550.57 2307.61,3616.94 2763.79,3616.94 P8.13@2820.28,3673.43 ; P7.18@1576.38,2524.02 2344.8,2524.02 U5.89@2565.27,2303.55 2601.1,2267.72 v1(2771.65,2267.72) ; P1.8@704.08,3028.21 ccw(c658.79,3073.49) 722.83,3073.49 ; P1.8@704.08,3028.21 ccw(c658.79,3073.49) 722.83,3073.49 ; P1.8@704.08,3028.21 ccw(c658.79,3073.49) 722.83,3073.49 ; P1.8@708.32,3023.96 ccw(c673.28,3059.01) 722.83,3059.01 ; P1.8@708.32,3023.96 ccw(c673.28,3059.01) 722.83,3059.01 ; P1.8@708.32,3023.96 ccw(c673.28,3059.01) 722.83,3059.01 ; P1.8@712.56,3019.72 ccw(c687.76,3044.52) 722.83,3044.52 ; P1.8@712.56,3019.72 ccw(c687.76,3044.52) 722.83,3044.52 ; P1.8@712.56,3019.72 ccw(c687.76,3044.52) 722.83,3044.52 ; 722.83,3044.52 ccw(c757.91,3044.52) P1.8@733.11,3019.72 ; 722.83,3044.52 ccw(c757.91,3044.52) P1.8@733.11,3019.72 ; 722.83,3044.52 ccw(c757.91,3044.52) P1.8@733.11,3019.72 ; 722.83,3059.01 ccw(c772.39,3059.01) P1.8@737.35,3023.96 ; 722.83,3059.01 ccw(c772.39,3059.01) P1.8@737.35,3023.96 ; 722.83,3059.01 ccw(c772.39,3059.01) P1.8@737.35,3023.96 ; 722.83,3073.49 ccw(c786.88,3073.49) P1.8@741.59,3028.21 ; 722.83,3073.49 ccw(c786.88,3073.49) P1.8@741.59,3028.21 ; 722.83,3073.49 ccw(c786.88,3073.49) P1.8@741.59,3028.21 ; P7.18@1586.65,2513.74 cw(c1611.45,2488.94) 1611.45,2524.02 ; P7.18@1586.65,2513.74 cw(c1611.45,2488.94) 1611.45,2524.02 ; P7.18@1586.65,2513.74 cw(c1611.45,2488.94) 1611.45,2524.02 ; P7.18@1586.65,2534.29 ccw(c1611.45,2559.09) 1611.45,2524.02 ; P7.18@1586.65,2534.29 ccw(c1611.45,2559.09) 1611.45,2524.02 ; P7.18@1586.65,2534.29 ccw(c1611.45,2559.09) 1611.45,2524.02 ; P7.18@1590.89,2509.5 cw(c1625.93,2474.46) 1625.93,2524.02 ; P7.18@1590.89,2509.5 cw(c1625.93,2474.46) 1625.93,2524.02 ; P7.18@1590.89,2509.5 cw(c1625.93,2474.46) 1625.93,2524.02 ; P7.18@1590.89,2538.53 ccw(c1625.94,2573.57) 1625.94,2524.02 ; P7.18@1590.89,2538.53 ccw(c1625.94,2573.57) 1625.94,2524.02 ; P7.18@1590.89,2538.53 ccw(c1625.94,2573.57) 1625.94,2524.02 ; P7.18@1595.14,2505.26 cw(c1640.42,2459.97) 1640.42,2524.02 ; P7.18@1595.14,2505.26 cw(c1640.42,2459.97) 1640.42,2524.02 ; P7.18@1595.14,2505.26 cw(c1640.42,2459.97) 1640.42,2524.02 ; P7.18@1595.14,2542.77 ccw(c1640.42,2588.06) 1640.42,2524.02 ; P7.18@1595.14,2542.77 ccw(c1640.42,2588.06) 1640.42,2524.02 ; P7.18@1595.14,2542.77 ccw(c1640.42,2588.06) 1640.42,2524.02 ; 2539.43,2329.39 cw(c2534.47,2324.43) U5.89@2541.48,2324.43 ; 2539.43,2329.39 ccw(c2544.39,2334.35) U5.89@2544.39,2327.33 ; 2539.43,2329.39 ccw(c2544.39,2334.35) U5.89@2544.39,2327.33 ; 2539.43,2329.39 cw(c2534.47,2324.43) U5.89@2541.48,2324.43 ; 2539.43,2329.39 ccw(c2544.39,2334.35) U5.89@2544.39,2327.33 ; 2539.43,2329.39 cw(c2534.47,2324.43) U5.89@2541.48,2324.43 ; U5.89@2586.15,2279.76 cw(c2586.15,2272.75) 2591.11,2277.71 ; U5.89@2586.15,2279.76 cw(c2586.15,2272.75) 2591.11,2277.71 ; U5.89@2586.15,2279.76 cw(c2586.15,2272.75) 2591.11,2277.71 ; U5.89@2589.05,2282.67 ccw(c2596.07,2282.67) 2591.11,2277.71 ; U5.89@2589.05,2282.67 ccw(c2596.07,2282.67) 2591.11,2277.71 ; U5.89@2589.05,2282.67 ccw(c2596.07,2282.67) 2591.11,2277.71 ; 2750.38,2267.72 cw(c2750.38,2246.44) v1@2765.42,2261.49 ; 2750.38,2267.72 ccw(c2750.38,2288.99) v1@2765.42,2273.95 ; 2750.38,2267.72 ccw(c2750.38,2288.99) v1@2765.42,2273.95 ; 2750.38,2267.72 cw(c2750.38,2246.44) v1@2765.42,2261.49 ; 2750.38,2267.72 ccw(c2750.38,2288.99) v1@2765.42,2273.95 ; 2750.38,2267.72 cw(c2750.38,2246.44) v1@2765.42,2261.49 ; 2774.99,3628.14 cw(c2820.28,3582.85) P8.13@2820.28,3646.9 ; 2774.99,3628.14 ccw(c2729.7,3673.43) P8.13@2793.75,3673.43 ; 2774.99,3628.14 ccw(c2729.7,3673.43) P8.13@2793.75,3673.43 ; 2774.99,3628.14 cw(c2820.28,3582.85) P8.13@2820.28,3646.9 ; 2774.99,3628.14 ccw(c2729.7,3673.43) P8.13@2793.75,3673.43 ; 2774.99,3628.14 cw(c2820.28,3582.85) P8.13@2820.28,3646.9 ; 2785.23,3638.38 cw(c2820.28,3603.34) P8.13@2820.28,3652.9 ; 2785.23,3638.38 ccw(c2750.19,3673.43) P8.13@2799.75,3673.43 ; 2785.23,3638.38 ccw(c2750.19,3673.43) P8.13@2799.75,3673.43 ; 2785.23,3638.38 cw(c2820.28,3603.34) P8.13@2820.28,3652.9 ; 2785.23,3638.38 ccw(c2750.19,3673.43) P8.13@2799.75,3673.43 ; 2785.23,3638.38 cw(c2820.28,3603.34) P8.13@2820.28,3652.9 ; 2786.25,3645.43 cw(c2828.32,3634.16) P8.13@2819.58,3676.83 ; 2786.25,3645.43 cw(c2828.32,3634.16) P8.13@2819.58,3676.83 ; 2786.25,3645.43 cw(c2828.32,3634.16) P8.13@2819.58,3676.83 ; 2788.76,3654.81 cw(c2826.14,3644.8) P8.13@2818.38,3682.71 ; 2788.76,3654.81 cw(c2826.14,3644.8) P8.13@2818.38,3682.71 ; 2788.76,3654.81 cw(c2826.14,3644.8) P8.13@2818.38,3682.71 ; 2791.27,3664.19 cw(c2823.96,3655.43) P8.13@2817.17,3688.58 ; 2791.27,3664.19 cw(c2823.96,3655.43) P8.13@2817.17,3688.58 ; 2791.27,3664.19 cw(c2823.96,3655.43) P8.13@2817.17,3688.58 ; 2792.28,3639.4 ccw(c2781.01,3681.47) P8.13@2823.68,3672.73 ; 2792.28,3639.4 ccw(c2781.01,3681.47) P8.13@2823.68,3672.73 ; 2792.28,3639.4 ccw(c2781.01,3681.47) P8.13@2823.68,3672.73 ; 2792.97,3648.14 cw(c2822.76,3640.15) P8.13@2820.46,3670.9 ; 2792.97,3648.14 cw(c2822.76,3640.15) P8.13@2820.46,3670.9 ; 2792.97,3648.14 cw(c2822.76,3640.15) P8.13@2820.46,3670.9 ; 2794.99,3646.12 ccw(c2787,3675.91) P8.13@2817.76,3673.61 ; 2794.99,3646.12 ccw(c2787,3675.91) P8.13@2817.76,3673.61 ; 2794.99,3646.12 ccw(c2787,3675.91) P8.13@2817.76,3673.61 ; 2795.16,3656.3 cw(c2822.09,3649.08) P8.13@2820.02,3676.89 ; 2795.16,3656.3 cw(c2822.09,3649.08) P8.13@2820.02,3676.89 ; 2795.16,3656.3 cw(c2822.09,3649.08) P8.13@2820.02,3676.89 ; 2795.48,3648.63 cw(c2820.28,3623.83) P8.13@2820.28,3658.9 ; 2795.48,3648.63 ccw(c2770.68,3673.43) P8.13@2805.75,3673.43 ; 2795.48,3648.63 ccw(c2770.68,3673.43) P8.13@2805.75,3673.43 ; 2795.48,3648.63 cw(c2820.28,3623.83) P8.13@2820.28,3658.9 ; 2795.48,3648.63 ccw(c2770.68,3673.43) P8.13@2805.75,3673.43 ; 2795.48,3648.63 cw(c2820.28,3623.83) P8.13@2820.28,3658.9 ; 2801.66,3641.91 ccw(c2791.65,3679.29) P8.13@2829.56,3671.52 ; 2801.66,3641.91 ccw(c2791.65,3679.29) P8.13@2829.56,3671.52 ; 2801.66,3641.91 ccw(c2791.65,3679.29) P8.13@2829.56,3671.52 ; 2803.15,3648.31 ccw(c2795.93,3675.24) P8.13@2823.74,3673.17 ; 2803.15,3648.31 ccw(c2795.93,3675.24) P8.13@2823.74,3673.17 ; 2803.15,3648.31 ccw(c2795.93,3675.24) P8.13@2823.74,3673.17 ; 2811.04,3644.42 ccw(c2802.28,3677.11) P8.13@2835.43,3670.32 ; 2811.04,3644.42 ccw(c2802.28,3677.11) P8.13@2835.43,3670.32 ; 2811.04,3644.42 ccw(c2802.28,3677.11) P8.13@2835.43,3670.32
  Bottom Layer w6: v1(2771.65,2267.72) 2771.65,3624.8 P8.13@2820.28,3673.43 ; v1@2765.42,2273.95 ccw(c2750.38,2288.99) 2771.65,2288.99 ; v1@2765.42,2273.95 ccw(c2750.38,2288.99) 2771.65,2288.99 ; v1@2765.42,2273.95 ccw(c2750.38,2288.99) 2771.65,2288.99 ; 2771.65,2288.99 ccw(c2792.93,2288.99) v1@2777.88,2273.95 ; 2771.65,2288.99 ccw(c2792.93,2288.99) v1@2777.88,2273.95 ; 2771.65,2288.99 ccw(c2792.93,2288.99) v1@2777.88,2273.95 ; 2774.99,3628.14 cw(c2820.28,3582.85) P8.13@2820.28,3646.9 ; 2774.99,3628.14 ccw(c2729.7,3673.43) P8.13@2793.75,3673.43 ; 2774.99,3628.14 ccw(c2729.7,3673.43) P8.13@2793.75,3673.43 ; 2774.99,3628.14 cw(c2820.28,3582.85) P8.13@2820.28,3646.9 ; 2774.99,3628.14 ccw(c2729.7,3673.43) P8.13@2793.75,3673.43 ; 2774.99,3628.14 cw(c2820.28,3582.85) P8.13@2820.28,3646.9 ; 2785.23,3638.38 cw(c2820.28,3603.34) P8.13@2820.28,3652.9 ; 2785.23,3638.38 ccw(c2750.19,3673.43) P8.13@2799.75,3673.43 ; 2785.23,3638.38 ccw(c2750.19,3673.43) P8.13@2799.75,3673.43 ; 2785.23,3638.38 cw(c2820.28,3603.34) P8.13@2820.28,3652.9 ; 2785.23,3638.38 ccw(c2750.19,3673.43) P8.13@2799.75,3673.43 ; 2785.23,3638.38 cw(c2820.28,3603.34) P8.13@2820.28,3652.9 ; 2795.48,3648.63 cw(c2820.28,3623.83) P8.13@2820.28,3658.9 ; 2795.48,3648.63 ccw(c2770.68,3673.43) P8.13@2805.75,3673.43 ; 2795.48,3648.63 ccw(c2770.68,3673.43) P8.13@2805.75,3673.43 ; 2795.48,3648.63 cw(c2820.28,3623.83) P8.13@2820.28,3658.9 ; 2795.48,3648.63 ccw(c2770.68,3673.43) P8.13@2805.75,3673.43 ; 2795.48,3648.63 cw(c2820.28,3623.83) P8.13@2820.28,3658.9
PB4: P7.19 P8.3 U5.90 | length 5312.6
  Top Layer w6: P7.19@1476.38,2424.02 1526.77,2474.41 v1(2319.88,2474.41) 2366.57,2474.41 U5.90@2551.35,2289.63 ; P7.19@1461.22,2427.12 cw(c1494.37,2420.33) 1485.61,2453.02 ; P7.19@1461.22,2427.12 cw(c1494.37,2420.33) 1485.61,2453.02 ; P7.19@1461.22,2427.12 cw(c1494.37,2420.33) 1485.61,2453.02 ; P7.19@1467.1,2425.92 cw(c1505.01,2418.15) 1494.99,2455.53 ; P7.19@1467.1,2425.92 cw(c1505.01,2418.15) 1494.99,2455.53 ; P7.19@1467.1,2425.92 cw(c1505.01,2418.15) 1494.99,2455.53 ; P7.19@1472.92,2424.27 cw(c1500.72,2422.2) 1493.5,2449.13 ; P7.19@1472.92,2424.27 cw(c1500.72,2422.2) 1493.5,2449.13 ; P7.19@1472.92,2424.27 cw(c1500.72,2422.2) 1493.5,2449.13 ; P7.19@1472.98,2424.71 cw(c1515.64,2415.98) 1504.37,2458.04 ; P7.19@1472.98,2424.71 cw(c1515.64,2415.98) 1504.37,2458.04 ; P7.19@1472.98,2424.71 cw(c1515.64,2415.98) 1504.37,2458.04 ; P7.19@1476.19,2426.54 ccw(c1473.9,2457.29) 1503.68,2449.31 ; P7.19@1476.19,2426.54 ccw(c1473.9,2457.29) 1503.68,2449.31 ; P7.19@1476.19,2426.54 ccw(c1473.9,2457.29) 1503.68,2449.31 ; P7.19@1476.38,2438.54 ccw(c1476.38,2473.62) 1501.18,2448.82 ; P7.19@1476.38,2438.54 ccw(c1476.38,2473.62) 1501.18,2448.82 ; P7.19@1476.38,2438.54 ccw(c1476.38,2473.62) 1501.18,2448.82 ; P7.19@1476.38,2444.54 ccw(c1476.38,2494.1) 1511.42,2459.06 ; P7.19@1476.38,2444.54 ccw(c1476.38,2494.1) 1511.42,2459.06 ; P7.19@1476.38,2444.54 ccw(c1476.38,2494.1) 1511.42,2459.06 ; P7.19@1476.38,2450.54 ccw(c1476.38,2514.59) 1521.66,2469.3 ; P7.19@1476.38,2450.54 ccw(c1476.38,2514.59) 1521.66,2469.3 ; P7.19@1476.38,2450.54 ccw(c1476.38,2514.59) 1521.66,2469.3 ; P7.19@1476.64,2420.55 ccw(c1474.56,2448.36) 1501.49,2441.14 ; P7.19@1476.64,2420.55 ccw(c1474.56,2448.36) 1501.49,2441.14 ; P7.19@1476.64,2420.55 ccw(c1474.56,2448.36) 1501.49,2441.14 ; P7.19@1477.07,2420.61 ccw(c1468.34,2463.28) 1510.41,2452.01 ; P7.19@1477.07,2420.61 ccw(c1468.34,2463.28) 1510.41,2452.01 ; P7.19@1477.07,2420.61 ccw(c1468.34,2463.28) 1510.41,2452.01 ; P7.19@1478.28,2414.74 ccw(c1470.52,2452.65) 1507.89,2442.63 ; P7.19@1478.28,2414.74 ccw(c1470.52,2452.65) 1507.89,2442.63 ; P7.19@1478.28,2414.74 ccw(c1470.52,2452.65) 1507.89,2442.63 ; P7.19@1478.9,2423.83 cw(c1509.65,2421.53) 1501.67,2451.32 ; P7.19@1478.9,2423.83 cw(c1509.65,2421.53) 1501.67,2451.32 ; P7.19@1478.9,2423.83 cw(c1509.65,2421.53) 1501.67,2451.32 ; P7.19@1479.48,2408.86 ccw(c1472.69,2442.01) 1505.38,2433.25 ; P7.19@1479.48,2408.86 ccw(c1472.69,2442.01) 1505.38,2433.25 ; P7.19@1479.48,2408.86 ccw(c1472.69,2442.01) 1505.38,2433.25 ; P7.19@1490.91,2424.02 cw(c1525.98,2424.02) 1501.18,2448.82 ; P7.19@1490.91,2424.02 cw(c1525.98,2424.02) 1501.18,2448.82 ; P7.19@1490.91,2424.02 cw(c1525.98,2424.02) 1501.18,2448.82 ; P7.19@1496.91,2424.02 cw(c1546.46,2424.02) 1511.42,2459.06 ; P7.19@1496.91,2424.02 cw(c1546.46,2424.02) 1511.42,2459.06 ; P7.19@1496.91,2424.02 cw(c1546.46,2424.02) 1511.42,2459.06 ; P7.19@1502.91,2424.02 cw(c1566.95,2424.02) 1521.66,2469.3 ; P7.19@1502.91,2424.02 cw(c1566.95,2424.02) 1521.66,2469.3 ; P7.19@1502.91,2424.02 cw(c1566.95,2424.02) 1521.66,2469.3 ; 2298.61,2474.41 cw(c2298.61,2453.14) v1@2313.65,2468.18 ; 2298.61,2474.41 ccw(c2298.61,2495.68) v1@2313.65,2480.64 ; 2298.61,2474.41 ccw(c2298.61,2495.68) v1@2313.65,2480.64 ; 2298.61,2474.41 cw(c2298.61,2453.14) v1@2313.65,2468.18 ; 2298.61,2474.41 ccw(c2298.61,2495.68) v1@2313.65,2480.64 ; 2298.61,2474.41 cw(c2298.61,2453.14) v1@2313.65,2468.18 ; v1@2326.11,2468.18 cw(c2341.15,2453.14) 2341.15,2474.41 ; v1@2326.11,2468.18 cw(c2341.15,2453.14) 2341.15,2474.41 ; v1@2326.11,2468.18 cw(c2341.15,2453.14) 2341.15,2474.41 ; v1@2326.11,2480.64 ccw(c2341.15,2495.68) 2341.15,2474.41 ; v1@2326.11,2480.64 ccw(c2341.15,2495.68) 2341.15,2474.41 ; v1@2326.11,2480.64 ccw(c2341.15,2495.68) 2341.15,2474.41 ; 2525.51,2315.47 cw(c2520.55,2310.51) U5.90@2527.56,2310.51 ; 2525.51,2315.47 ccw(c2530.47,2320.43) U5.90@2530.47,2313.41 ; 2525.51,2315.47 ccw(c2530.47,2320.43) U5.90@2530.47,2313.41 ; 2525.51,2315.47 cw(c2520.55,2310.51) U5.90@2527.56,2310.51 ; 2525.51,2315.47 ccw(c2530.47,2320.43) U5.90@2530.47,2313.41 ; 2525.51,2315.47 cw(c2520.55,2310.51) U5.90@2527.56,2310.51
  Bottom Layer w6: v1(2319.88,2474.41) 2320.28,2474.8 P8.3@2320.28,3673.43 ; P8.3@2301.52,3654.67 cw(c2256.23,3609.38) 2320.28,3609.38 ; P8.3@2301.52,3654.67 cw(c2256.23,3609.38) 2320.28,3609.38 ; P8.3@2301.52,3654.67 cw(c2256.23,3609.38) 2320.28,3609.38 ; P8.3@2305.76,3658.91 cw(c2270.72,3623.87) 2320.28,3623.87 ; P8.3@2305.76,3658.91 cw(c2270.72,3623.87) 2320.28,3623.87 ; P8.3@2305.76,3658.91 cw(c2270.72,3623.87) 2320.28,3623.87 ; P8.3@2310,3663.15 cw(c2285.2,3638.35) 2320.28,3638.35 ; P8.3@2310,3663.15 cw(c2285.2,3638.35) 2320.28,3638.35 ; P8.3@2310,3663.15 cw(c2285.2,3638.35) 2320.28,3638.35 ; v1@2313.65,2480.64 ccw(c2297.66,2496.63) 2320.28,2496.63 ; v1@2313.65,2480.64 ccw(c2297.66,2496.63) 2320.28,2496.63 ; v1@2313.65,2480.64 ccw(c2297.66,2496.63) 2320.28,2496.63 ; 2320.28,2494.73 ccw(c2340.2,2494.73) v1@2326.11,2480.64 ; 2320.28,2494.73 ccw(c2340.2,2494.73) v1@2326.11,2480.64 ; 2320.28,2494.73 ccw(c2340.2,2494.73) v1@2326.11,2480.64 ; 2320.28,3609.38 cw(c2384.32,3609.38) P8.3@2339.03,3654.67 ; 2320.28,3609.38 cw(c2384.32,3609.38) P8.3@2339.03,3654.67 ; 2320.28,3609.38 cw(c2384.32,3609.38) P8.3@2339.03,3654.67 ; 2320.28,3623.87 cw(c2369.83,3623.87) P8.3@2334.79,3658.91 ; 2320.28,3623.87 cw(c2369.83,3623.87) P8.3@2334.79,3658.91 ; 2320.28,3623.87 cw(c2369.83,3623.87) P8.3@2334.79,3658.91 ; 2320.28,3638.35 cw(c2355.35,3638.35) P8.3@2330.55,3663.15 ; 2320.28,3638.35 cw(c2355.35,3638.35) P8.3@2330.55,3663.15 ; 2320.28,3638.35 cw(c2355.35,3638.35) P8.3@2330.55,3663.15
PB5: P7.20 U5.91 | length 1756.1
  Top Layer w6: P7.20@1576.38,2424.02 2389.12,2424.02 U5.91@2537.43,2275.71 ; P7.20@1586.65,2413.74 cw(c1611.45,2388.94) 1611.45,2424.02 ; P7.20@1586.65,2413.74 cw(c1611.45,2388.94) 1611.45,2424.02 ; P7.20@1586.65,2413.74 cw(c1611.45,2388.94) 1611.45,2424.02 ; P7.20@1586.65,2434.29 ccw(c1611.45,2459.09) 1611.45,2424.02 ; P7.20@1586.65,2434.29 ccw(c1611.45,2459.09) 1611.45,2424.02 ; P7.20@1586.65,2434.29 ccw(c1611.45,2459.09) 1611.45,2424.02 ; P7.20@1590.89,2409.5 cw(c1625.93,2374.46) 1625.93,2424.02 ; P7.20@1590.89,2409.5 cw(c1625.93,2374.46) 1625.93,2424.02 ; P7.20@1590.89,2409.5 cw(c1625.93,2374.46) 1625.93,2424.02 ; P7.20@1590.89,2438.53 ccw(c1625.94,2473.57) 1625.94,2424.02 ; P7.20@1590.89,2438.53 ccw(c1625.94,2473.57) 1625.94,2424.02 ; P7.20@1590.89,2438.53 ccw(c1625.94,2473.57) 1625.94,2424.02 ; P7.20@1595.14,2405.26 cw(c1640.42,2359.97) 1640.42,2424.02 ; P7.20@1595.14,2405.26 cw(c1640.42,2359.97) 1640.42,2424.02 ; P7.20@1595.14,2405.26 cw(c1640.42,2359.97) 1640.42,2424.02 ; P7.20@1595.14,2442.77 ccw(c1640.42,2488.06) 1640.42,2424.02 ; P7.20@1595.14,2442.77 ccw(c1640.42,2488.06) 1640.42,2424.02 ; P7.20@1595.14,2442.77 ccw(c1640.42,2488.06) 1640.42,2424.02 ; 2511.59,2301.55 cw(c2506.63,2296.59) U5.91@2513.64,2296.59 ; 2511.59,2301.55 ccw(c2516.55,2306.51) U5.91@2516.55,2299.49 ; 2511.59,2301.55 ccw(c2516.55,2306.51) U5.91@2516.55,2299.49 ; 2511.59,2301.55 cw(c2506.63,2296.59) U5.91@2513.64,2296.59 ; 2511.59,2301.55 ccw(c2516.55,2306.51) U5.91@2516.55,2299.49 ; 2511.59,2301.55 cw(c2506.63,2296.59) U5.91@2513.64,2296.59
PB6: P7.21 U5.92 | length 3058.9
  Top Layer w6: P7.21@1476.38,2324.02 1532.28,2379.92 2405.38,2379.92 U5.92@2523.51,2261.79 ; P7.21@1461.22,2327.12 cw(c1494.37,2320.33) 1485.61,2353.02 ; P7.21@1461.22,2327.12 cw(c1494.37,2320.33) 1485.61,2353.02 ; P7.21@1461.22,2327.12 cw(c1494.37,2320.33) 1485.61,2353.02 ; P7.21@1467.1,2325.92 cw(c1505.01,2318.15) 1494.99,2355.53 ; P7.21@1467.1,2325.92 cw(c1505.01,2318.15) 1494.99,2355.53 ; P7.21@1467.1,2325.92 cw(c1505.01,2318.15) 1494.99,2355.53 ; P7.21@1472.92,2324.27 cw(c1500.72,2322.2) 1493.5,2349.13 ; P7.21@1472.92,2324.27 cw(c1500.72,2322.2) 1493.5,2349.13 ; P7.21@1472.92,2324.27 cw(c1500.72,2322.2) 1493.5,2349.13 ; P7.21@1472.98,2324.71 cw(c1515.64,2315.98) 1504.37,2358.04 ; P7.21@1472.98,2324.71 cw(c1515.64,2315.98) 1504.37,2358.04 ; P7.21@1472.98,2324.71 cw(c1515.64,2315.98) 1504.37,2358.04 ; P7.21@1476.19,2326.54 ccw(c1473.9,2357.29) 1503.68,2349.31 ; P7.21@1476.19,2326.54 ccw(c1473.9,2357.29) 1503.68,2349.31 ; P7.21@1476.19,2326.54 ccw(c1473.9,2357.29) 1503.68,2349.31 ; P7.21@1476.38,2338.54 ccw(c1476.38,2373.62) 1501.18,2348.82 ; P7.21@1476.38,2338.54 ccw(c1476.38,2373.62) 1501.18,2348.82 ; P7.21@1476.38,2338.54 ccw(c1476.38,2373.62) 1501.18,2348.82 ; P7.21@1476.38,2344.54 ccw(c1476.38,2394.1) 1511.42,2359.06 ; P7.21@1476.38,2344.54 ccw(c1476.38,2394.1) 1511.42,2359.06 ; P7.21@1476.38,2344.54 ccw(c1476.38,2394.1) 1511.42,2359.06 ; P7.21@1476.38,2350.54 ccw(c1476.38,2414.59) 1521.66,2369.3 ; P7.21@1476.38,2350.54 ccw(c1476.38,2414.59) 1521.66,2369.3 ; P7.21@1476.38,2350.54 ccw(c1476.38,2414.59) 1521.66,2369.3 ; P7.21@1476.64,2320.55 ccw(c1474.56,2348.36) 1501.49,2341.14 ; P7.21@1476.64,2320.55 ccw(c1474.56,2348.36) 1501.49,2341.14 ; P7.21@1476.64,2320.55 ccw(c1474.56,2348.36) 1501.49,2341.14 ; P7.21@1477.07,2320.61 ccw(c1468.34,2363.28) 1510.41,2352.01 ; P7.21@1477.07,2320.61 ccw(c1468.34,2363.28) 1510.41,2352.01 ; P7.21@1477.07,2320.61 ccw(c1468.34,2363.28) 1510.41,2352.01 ; P7.21@1478.28,2314.74 ccw(c1470.52,2352.65) 1507.89,2342.63 ; P7.21@1478.28,2314.74 ccw(c1470.52,2352.65) 1507.89,2342.63 ; P7.21@1478.28,2314.74 ccw(c1470.52,2352.65) 1507.89,2342.63 ; P7.21@1478.9,2323.83 cw(c1509.65,2321.53) 1501.67,2351.32 ; P7.21@1478.9,2323.83 cw(c1509.65,2321.53) 1501.67,2351.32 ; P7.21@1478.9,2323.83 cw(c1509.65,2321.53) 1501.67,2351.32 ; P7.21@1479.48,2308.86 ccw(c1472.69,2342.01) 1505.38,2333.25 ; P7.21@1479.48,2308.86 ccw(c1472.69,2342.01) 1505.38,2333.25 ; P7.21@1479.48,2308.86 ccw(c1472.69,2342.01) 1505.38,2333.25 ; P7.21@1490.91,2324.02 cw(c1525.98,2324.02) 1501.18,2348.82 ; P7.21@1490.91,2324.02 cw(c1525.98,2324.02) 1501.18,2348.82 ; P7.21@1490.91,2324.02 cw(c1525.98,2324.02) 1501.18,2348.82 ; P7.21@1496.91,2324.02 cw(c1546.46,2324.02) 1511.42,2359.06 ; P7.21@1496.91,2324.02 cw(c1546.46,2324.02) 1511.42,2359.06 ; P7.21@1496.91,2324.02 cw(c1546.46,2324.02) 1511.42,2359.06 ; P7.21@1502.91,2324.02 cw(c1566.95,2324.02) 1521.66,2369.3 ; P7.21@1502.91,2324.02 cw(c1566.95,2324.02) 1521.66,2369.3 ; P7.21@1502.91,2324.02 cw(c1566.95,2324.02) 1521.66,2369.3 ; 2497.67,2287.63 cw(c2492.71,2282.67) U5.92@2499.72,2282.67 ; 2497.67,2287.63 ccw(c2502.63,2292.59) U5.92@2502.63,2285.57 ; 2497.67,2287.63 ccw(c2502.63,2292.59) U5.92@2502.63,2285.57 ; 2497.67,2287.63 cw(c2492.71,2282.67) U5.92@2499.72,2282.67 ; 2497.67,2287.63 ccw(c2502.63,2292.59) U5.92@2502.63,2285.57 ; 2497.67,2287.63 cw(c2492.71,2282.67) U5.92@2499.72,2282.67
PB7: P7.22 U5.93 | length 1698.4
  Top Layer w6: P7.22@1576.38,2324.02 2433.44,2324.02 U5.93@2509.59,2247.87 ; P7.22@1586.65,2313.74 cw(c1611.45,2288.94) 1611.45,2324.02 ; P7.22@1586.65,2313.74 cw(c1611.45,2288.94) 1611.45,2324.02 ; P7.22@1586.65,2313.74 cw(c1611.45,2288.94) 1611.45,2324.02 ; P7.22@1586.65,2334.29 ccw(c1611.45,2359.09) 1611.45,2324.02 ; P7.22@1586.65,2334.29 ccw(c1611.45,2359.09) 1611.45,2324.02 ; P7.22@1586.65,2334.29 ccw(c1611.45,2359.09) 1611.45,2324.02 ; P7.22@1590.89,2309.5 cw(c1625.93,2274.46) 1625.93,2324.02 ; P7.22@1590.89,2309.5 cw(c1625.93,2274.46) 1625.93,2324.02 ; P7.22@1590.89,2309.5 cw(c1625.93,2274.46) 1625.93,2324.02 ; P7.22@1590.89,2338.53 ccw(c1625.94,2373.57) 1625.94,2324.02 ; P7.22@1590.89,2338.53 ccw(c1625.94,2373.57) 1625.94,2324.02 ; P7.22@1590.89,2338.53 ccw(c1625.94,2373.57) 1625.94,2324.02 ; P7.22@1595.14,2305.26 cw(c1640.42,2259.97) 1640.42,2324.02 ; P7.22@1595.14,2305.26 cw(c1640.42,2259.97) 1640.42,2324.02 ; P7.22@1595.14,2305.26 cw(c1640.42,2259.97) 1640.42,2324.02 ; P7.22@1595.14,2342.77 ccw(c1640.42,2388.06) 1640.42,2324.02 ; P7.22@1595.14,2342.77 ccw(c1640.42,2388.06) 1640.42,2324.02 ; P7.22@1595.14,2342.77 ccw(c1640.42,2388.06) 1640.42,2324.02 ; 2483.75,2273.71 cw(c2478.79,2268.75) U5.93@2485.81,2268.75 ; 2483.75,2273.71 ccw(c2488.71,2278.67) U5.93@2488.71,2271.65 ; 2483.75,2273.71 ccw(c2488.71,2278.67) U5.93@2488.71,2271.65 ; 2483.75,2273.71 cw(c2478.79,2268.75) U5.93@2485.81,2268.75 ; 2483.75,2273.71 ccw(c2488.71,2278.67) U5.93@2488.71,2271.65 ; 2483.75,2273.71 cw(c2478.79,2268.75) U5.93@2485.81,2268.75
PB8: P7.23 U5.95 | length 2385.2
  Top Layer w6: P7.23@1476.38,2224.02 1517.13,2264.76 2437.02,2264.76 U5.95@2481.75,2220.03 ; P7.23@1462.22,2230.25 cw(c1497.67,2214.65) 1490.57,2252.73 ; P7.23@1462.22,2230.25 cw(c1497.67,2214.65) 1490.57,2252.73 ; P7.23@1462.22,2230.25 cw(c1497.67,2214.65) 1490.57,2252.73 ; P7.23@1467.71,2227.83 cw(c1510.26,2209.11) 1501.74,2254.81 ; P7.23@1467.71,2227.83 cw(c1510.26,2209.11) 1501.74,2254.81 ; P7.23@1467.71,2227.83 cw(c1510.26,2209.11) 1501.74,2254.81 ; P7.23@1473.06,2225.03 cw(c1505.45,2215.16) 1499.24,2248.45 ; P7.23@1473.06,2225.03 cw(c1505.45,2215.16) 1499.24,2248.45 ; P7.23@1473.06,2225.03 cw(c1505.45,2215.16) 1499.24,2248.45 ; P7.23@1477.39,2220.69 ccw(c1467.52,2253.08) 1500.81,2246.88 ; P7.23@1477.39,2220.69 ccw(c1467.52,2253.08) 1500.81,2246.88 ; P7.23@1477.39,2220.69 ccw(c1467.52,2253.08) 1500.81,2246.88 ; P7.23@1477.5,2238.5 ccw(c1479.59,2265.43) 1498.69,2246.33 ; P7.23@1477.5,2238.5 ccw(c1479.59,2265.43) 1498.69,2246.33 ; P7.23@1477.5,2238.5 ccw(c1479.59,2265.43) 1498.69,2246.33 ; P7.23@1477.97,2244.48 ccw(c1480.92,2282.53) 1507.91,2255.55 ; P7.23@1477.97,2244.48 ccw(c1480.92,2282.53) 1507.91,2255.55 ; P7.23@1477.97,2244.48 ccw(c1480.92,2282.53) 1507.91,2255.55 ; P7.23@1478.43,2250.46 ccw(c1482.25,2299.64) 1517.12,2264.76 ; P7.23@1478.43,2250.46 ccw(c1482.25,2299.64) 1517.12,2264.76 ; P7.23@1478.43,2250.46 ccw(c1482.25,2299.64) 1517.12,2264.76 ; P7.23@1480.19,2215.35 ccw(c1461.47,2257.9) 1507.17,2249.38 ; P7.23@1480.19,2215.35 ccw(c1461.47,2257.9) 1507.17,2249.38 ; P7.23@1480.19,2215.35 ccw(c1461.47,2257.9) 1507.17,2249.38 ; P7.23@1482.61,2209.85 ccw(c1467.01,2245.31) 1505.09,2238.21 ; P7.23@1482.61,2209.85 ccw(c1467.01,2245.31) 1505.09,2238.21 ; P7.23@1482.61,2209.85 ccw(c1467.01,2245.31) 1505.09,2238.21 ; P7.23@1490.86,2225.14 cw(c1517.79,2227.23) 1498.69,2246.33 ; P7.23@1490.86,2225.14 cw(c1517.79,2227.23) 1498.69,2246.33 ; P7.23@1490.86,2225.14 cw(c1517.79,2227.23) 1498.69,2246.33 ; P7.23@1496.84,2225.6 cw(c1534.89,2228.56) 1507.91,2255.55 ; P7.23@1496.84,2225.6 cw(c1534.89,2228.56) 1507.91,2255.55 ; P7.23@1496.84,2225.6 cw(c1534.89,2228.56) 1507.91,2255.55 ; P7.23@1502.83,2226.07 cw(c1552,2229.89) 1517.12,2264.76 ; P7.23@1502.83,2226.07 cw(c1552,2229.89) 1517.12,2264.76 ; P7.23@1502.83,2226.07 cw(c1552,2229.89) 1517.12,2264.76 ; 2455.91,2245.87 cw(c2450.95,2240.91) U5.95@2457.97,2240.91 ; 2455.91,2245.87 ccw(c2460.87,2250.83) U5.95@2460.87,2243.82 ; 2455.91,2245.87 ccw(c2460.87,2250.83) U5.95@2460.87,2243.82 ; 2455.91,2245.87 cw(c2450.95,2240.91) U5.95@2457.97,2240.91 ; 2455.91,2245.87 ccw(c2460.87,2250.83) U5.95@2460.87,2243.82 ; 2455.91,2245.87 cw(c2450.95,2240.91) U5.95@2457.97,2240.91